# EAGLE board piggyboard (EAGLE 6.5.0)

Size 53.01 x 72.38 mm. Coordinates in mm from the lower left corner, seen from the top.
Outline: 0,0 53.01,0 53.01,72.38 0,72.38 0,0
Copper layers (1*16): Top 0.035mm / dielectric 1.5mm / Bottom 0.035mm
Design rules "default": minimum track width 10mil, minimum drill 24mil, track to track 8mil, track to pad 8mil, pad to pad 8mil, via to via 8mil, smd to smd 8mil, copper to edge 40mil, drill to drill 8mil, minimum pad ring 10mil, minimum via ring 8mil, stop-mask expansion 4mil, vias tented up to drill 0mil, thermal gap 10mil

## Footprints (pad centres in the part's own frame; a part is rotated, then mirrored left to right if it is on the bottom)
HIROSE-MICROSD-V2 = smd 0.7 x 1.2: CD/DAT3 7.38,14.68; CDS-B -0.17,14.68; CLK 4.08,14.68; CMD 6.28,14.68; DAT0 1.88,14.68; DAT1 0.78,14.68; DAT2 8.48,14.68; VDD 5.18,14.68; VSS 2.98,14.68 | smd 1 x 0.8: CDS-A -1.17,4.28 | drill 1 long: P$1 -6.985,25.781; P$2 -4.445,25.781; P$3 -1.905,25.781; P$4 0.635,25.781; P$5 3.175,25.781; P$6 5.715,25.781; P$7 8.255,25.781; P$8 10.795,25.781; P$9 13.335,25.781; P$10 15.875,25.781
DFN-2X2 = smd 0.35 x 0.65: FB 1,0; GND 0,2; GND1 1,2; GND2 1.5,2; GND3 1.5,0; SHDN 0,0; VIN 0.5,0; VOUT 0.5,2 | drill 1 long: P$1 -3.175,8.001; P$2 -0.635,8.001; P$3 1.905,8.001; P$4 4.445,8.001; P$5 4.445,-5.461; P$6 1.905,-5.461; P$7 -0.635,-5.461; P$8 -3.175,-5.461

## Placement (x,y rotation side)
U$1  HRS-MICRO-SD-PIGGY  [HIROSE-MICROSD-V2]  19.05,29.21 180 top
U$2  MCP1710  [DFN-2X2]  44.45,53.34 90 top
U$3  MCP1710  [DFN-2X2]  44.45,17.78 90 top
U$4  HRS-MICRO-SD-PIGGY  [HIROSE-MICROSD-V2]  10.16,41.91 0 top

## Library data of the parts
U$1 U$4 = hirosemicrosd-piggy
U$2 U$3 = MCP1710T-piggy